# Altium PCB E17-04-PCB.PcbDoc
Units mil, origin at the board's own origin, x right, y up, seen from the top; angles counter-clockwise.
Board outline 6000 x 4000 mil, 2 copper layers (Top Layer, Bottom Layer); 153 components, 110 nets, 483 pads, 0 vias.
Unrouted connection lines stored in the file: 293.
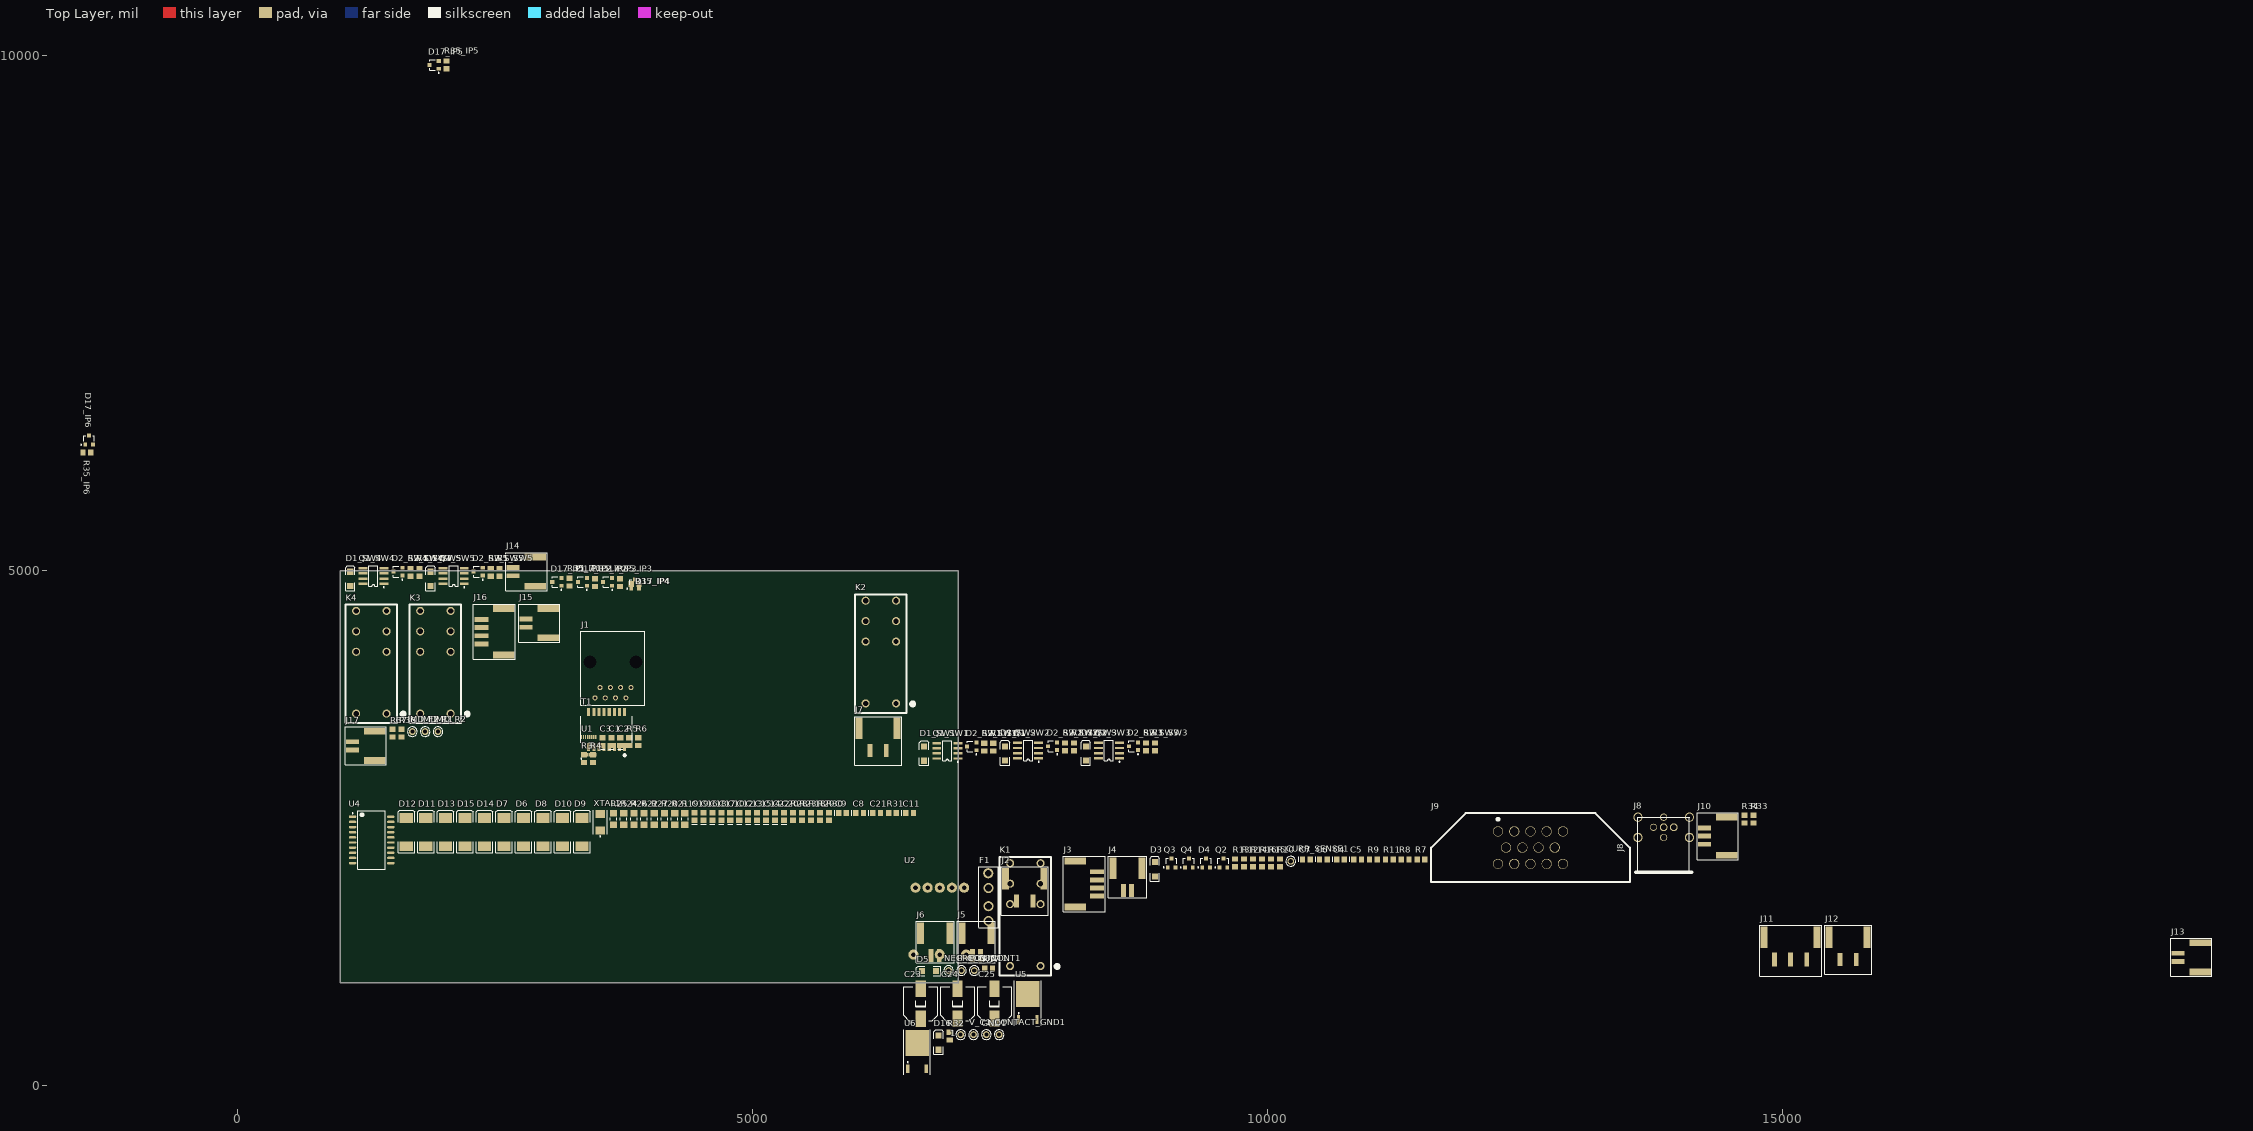
[diagram p0: Top Layer view]
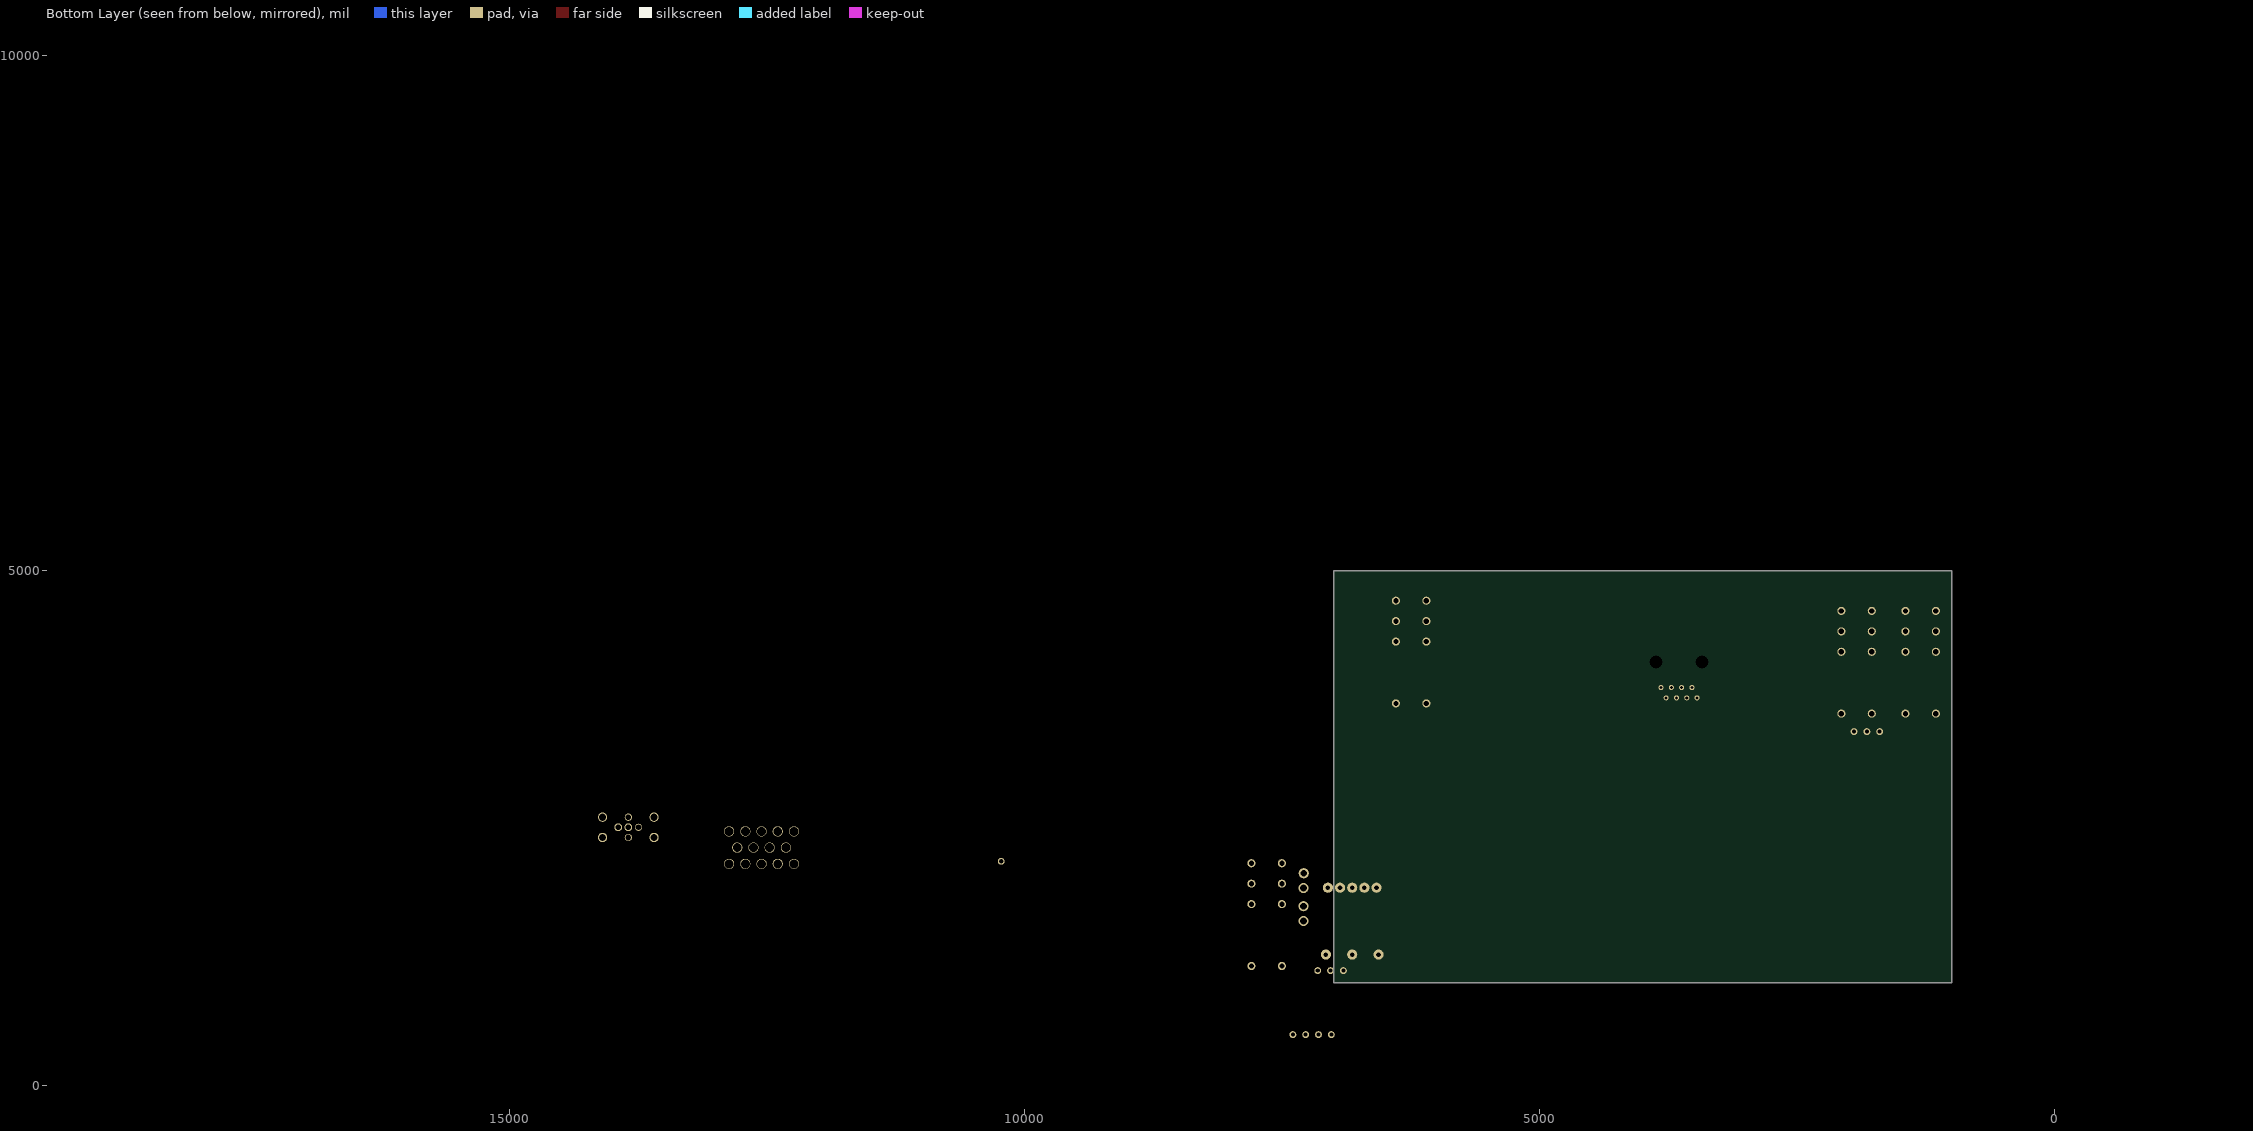
[diagram p1: Bottom Layer view, seen from below]

## Layer stack, top to bottom
Top Solder: solder mask 0.4, Solder Resist, Dk 3.5
Top Layer: signal copper 1.4
Dielectric 1: dielectric 12.6, FR-4, Dk 4.8
Bottom Layer: signal copper 1.4
Bottom Solder: solder mask 0.4, Solder Resist, Dk 3.5

## Board outline
1000,1000 7000,1000 7000,5000 1000,5000

## Design rules (kind name [scope] priority, off if disabled: settings)
Clearance [All] p1: gap=10
PolygonConnect [All] p1: connectstyle=Relief reliefconductorwidth=10 reliefentries=4 polygonreliefangle="90 Angle" airgapwidth=10
RoomDefinition SW5 [InComponentClass('SW5')] p1: confinementstyle=ConfineIn formatcopy=TRUE lockcomponents=FALSE outline 1810,4790 2590,4790 2590,5060 1810,5060
RoomDefinition SW4 [InComponentClass('SW4')] p2: confinementstyle=ConfineIn formatcopy=TRUE lockcomponents=FALSE outline 1030,4790 1810,4790 1810,5060 1030,5060
RoomDefinition SW3 [InComponentClass('SW3')] p3: confinementstyle=ConfineIn formatcopy=TRUE lockcomponents=FALSE outline 8170,3095 8955,3095 8955,3365 8170,3365
RoomDefinition SW2 [InComponentClass('SW2')] p4: confinementstyle=ConfineIn formatcopy=TRUE lockcomponents=FALSE outline 7385,3095 8170,3095 8170,3365 7385,3365
RoomDefinition SW1 [InComponentClass('SW1')] p5: confinementstyle=ConfineIn formatcopy=TRUE lockcomponents=FALSE outline 6600,3095 7385,3095 7385,3365 6600,3365
RoomDefinition IP6 [InComponentClass('IP6')] p6: confinementstyle=ConfineIn formatcopy=TRUE lockcomponents=FALSE outline 3150,3095 3320,3095 3320,3340 3150,3340
RoomDefinition TSMS [InComponentClass('TSMS')] p7: confinementstyle=ConfineIn formatcopy=TRUE lockcomponents=FALSE outline 2590,4790 2590,5190.08 3021.57,5190.08 3021.57,4790
RoomDefinition PCDC [InComponentClass('PCDC')] p8: confinementstyle=ConfineIn formatcopy=TRUE lockcomponents=FALSE outline 5975,3095 6600,3095 6600,4790 5975,4790
RoomDefinition MCU [InComponentClass('MCU')] p9: confinementstyle=ConfineIn formatcopy=TRUE lockcomponents=FALSE outline 3975,3095 5975,3095 5975,4095 3975,4095
RoomDefinition ISO_SPI [InComponentClass('ISO_SPI')] p10: confinementstyle=ConfineIn formatcopy=TRUE lockcomponents=FALSE outline 3320,3095 3975,3095 3975,4425 3320,4425
RoomDefinition IP5 [InComponentClass('IP5')] p11: confinementstyle=ConfineIn formatcopy=TRUE lockcomponents=FALSE outline 3941.57,4790 4111.57,4790 4111.57,5035 3941.57,5035
RoomDefinition IP4 [InComponentClass('IP4')] p12: confinementstyle=ConfineIn formatcopy=TRUE lockcomponents=FALSE outline 3761.57,4790 3941.57,4790 3941.57,4950 3761.57,4950
RoomDefinition IP3 [InComponentClass('IP3')] p13: confinementstyle=ConfineIn formatcopy=TRUE lockcomponents=FALSE outline 3516.57,4790 3761.57,4790 3761.57,4960 3516.57,4960
RoomDefinition IP2 [InComponentClass('IP2')] p14: confinementstyle=ConfineIn formatcopy=TRUE lockcomponents=FALSE outline 3271.57,4790 3516.57,4790 3516.57,4960 3271.57,4960
RoomDefinition IP1 [InComponentClass('IP1')] p15: confinementstyle=ConfineIn formatcopy=TRUE lockcomponents=FALSE outline 3021.57,4790 3271.57,4790 3271.57,4965 3021.57,4965
RoomDefinition IMD [InComponentClass('IMD')] p16: confinementstyle=ConfineIn formatcopy=TRUE lockcomponents=FALSE outline 1030,3095 3150,3095 3150,4690 1030,4690
RoomDefinition HVD [InComponentClass('HVD')] p17: confinementstyle=ConfineIn formatcopy=TRUE lockcomponents=FALSE outline 18755,1045 18755,1445.08 19186.57,1445.08 19186.57,1045
RoomDefinition Designator [InComponentClass('Designator')] p18: confinementstyle=ConfineIn formatcopy=TRUE lockcomponents=FALSE outline 17320,1045 18755,1045 18755,3095 17320,3095
RoomDefinition Designator [InComponentClass('Designator')] p19: confinementstyle=ConfineIn formatcopy=TRUE lockcomponents=FALSE outline 15885,1045 17320,1045 17320,3095 15885,3095
RoomDefinition CONN [InComponentClass('CONN')] p20: confinementstyle=ConfineIn formatcopy=TRUE lockcomponents=FALSE outline 11570,1045 14765,1045 14765,2665 11570,2665
RoomDefinition CON_HV [InComponentClass('CON_HV')] p21: confinementstyle=ConfineIn formatcopy=TRUE lockcomponents=FALSE outline 14765,1045 15885,1045 15885,1570 14765,1570
RoomDefinition BSPD [InComponentClass('BSPD')] p22: confinementstyle=ConfineIn formatcopy=TRUE lockcomponents=FALSE outline 7380,1045 11570,1045 11570,2240 7380,2240
RoomDefinition AIR [InComponentClass('AIR')] p23: confinementstyle=ConfineIn formatcopy=TRUE lockcomponents=FALSE outline 6575,1045 7380,1045 7380,1610 6575,1610
RoomDefinition ADC [InComponentClass('ADC')] p24: confinementstyle=ConfineIn formatcopy=TRUE lockcomponents=FALSE outline 1061.14,2079.39 6606.14,2079.39 6606.14,2689.39 1061.14,2689.39
RoutingVias [All] p1: holewidth=28 width=50 viastyle="Through Hole" minholewidth=28 minwidth=50 maxholewidth=28 maxwidth=50
SolderMaskExpansion [All] p1: expansion=4
Width [All] p1: maxlimit=10 minlimit=10 preferedwidth=10
30 further rules are at their usual default settings.

## Classes and differential pairs
component class IP6: D17_IP6 R35_IP6
channel class E17-04-INDUCTIVE_LOAD_SWITCH: SW_CONT_NEG SW_CONT_POS SW_IMD SW_RELAY_CHARGE_EN SW_RELAY_PRECHARGE
channel class Digital_IP: IP1 IP2 IP3 IP4 IP5 IP?
component class TSMS: J14
component class SW5: D1_SW5 D2_SW5 Q1_SW5 R1_SW5 R2_SW5
component class SW3: D1_SW3 D2_SW3 Q1_SW3 R1_SW3 R2_SW3
component class SW4: D1_SW4 D2_SW4 Q1_SW4 R1_SW4 R2_SW4
component class SW1: D1_SW1 D2_SW1 Q1_SW1 R1_SW1 R2_SW1
component class SW2: D1_SW2 D2_SW2 Q1_SW2 R1_SW2 R2_SW2
component class PCDC: J7 K2
component class MCU: PB1
component class ISO_SPI: C1 C2 C3 J1 R3 R4 R5 R6 T1 U1
component class Designator: 1 C23 C24 C25 CONTACT_GND1 D16 GND1 R32 U5 U6 V_C1
component class IP5: D17_IP6 R35_IP6
component class IP4: D17_IP4 R35_IP4
component class IP3: D17_IP3 R35_IP3
component class IP2: D17_IP2 R35_IP2
component class IP1: D17_IP1 R35_IP1
component class IMD: IMD_F2 IMD_R1 IMD_R2 J15 J16 J17 K3 K4 R36 R37
component class HVD: J13
component class Designator: F1 J2 U2
component class CONN: J8 J9 J10 R33 R34
component class CON_HV: J11 J12
component class BSPD: C4 C5 C6 C7 CURR_SENSE1 D3 D4 J3 J4 K1 Q2 Q3 Q4 R7 R8 R9 R10 R11 R12 R13 R14 R15 R16 U3 VR1 VR2
component class AIR: D5 J5 J6 NEG_CONT1 POS_CONT1 PRE_CONT1 R17
component class ADC: C8 C9 C10 C11 C12 C13 C14 C15 C16 C17 C18 C19 C20 C21 C22 D6 D7 D8 D9 D10 D11 D12 D13 D14 D15 R18 R19 R20 R21 R22 R23 R24 R25 R26 R27 R28 R29 R30 R31 U4 XTAL1

## Components (designator, comment, footprint, x,y, rotation, side; value= is the part's Value field where it differs from the comment)
1 "Test Point" "TEST POINT 5000K" 7022.25,494.32 r90 top
C1 "Cap" C0805 3630.1,3339.49 r90 top
C2 "Cap" C0805 3717.15,3339.49 r90 top
C3 "Cap" C0805 3543.04,3339.49 r90 top
C4 "Cap" C0805 10709.95,2196.47 r0 top
C5 "Cap" C0805 10875.69,2196.47 r0 top
C6 "Cap" C0805 10544.22,2196.47 r0 top
C7 "Cap" C0805 10378.49,2196.47 r0 top
C8 "Cap" C0805 6040.61,2645.87 r0 top
C9 "Cap" C0805 5874.87,2645.87 r0 top
C10 "Cap" C0805 4785,2612.4 r90 top
C11 "Cap" C0805 6526.06,2645.87 r0 top
C12 "Cap" C0805 4872.06,2612.4 r90 top
C13 "Cap" C0805 4959.11,2612.4 r90 top
C14 "Cap" C0805 5133.22,2612.4 r90 top
C15 "Cap" C0805 5046.16,2612.4 r90 top
C16 "Cap" C0805 4523.84,2612.4 r90 top
C17 "Cap" C0805 4697.94,2612.4 r90 top
C18 "Cap" C0805 4610.89,2612.4 r90 top
C19 "Cap" C0805 4436.78,2612.4 r90 top
C20 "Cap" C0805 5307.33,2612.4 r90 top
C21 "Cap" C0805 6206.34,2645.87 r0 top
C22 "Cap" C0805 5220.27,2612.4 r90 top
C23 "UWT1E470MCL1GB" UWT1E470MCL1GB 6634.29,794.98 r90 top
C24 "UWT1E470MCL1GB" UWT1E470MCL1GB 6992.87,794.98 r90 top
C25 "UWT1E470MCL1GB" UWT1E470MCL1GB 7351.45,794.98 r90 top
CONTACT_GND1 "Test Point" "TEST POINT 5000K" 7395.72,494.32 r90 top
CURR_SENSE1 "Test Point" "TEST POINT 5000K" 10227.5,2177.76 r90 top
D1_SW1 "OVS5MBBCR4" OVS5MBBCR4 6667.51,3223.11 r90 top (schematic designator D1)
D1_SW2 "OVS5MBBCR4" OVS5MBBCR4 7452.15,3225.08 r90 top (schematic designator D1)
D1_SW3 "OVS5MBBCR4" OVS5MBBCR4 8237.15,3225.08 r90 top (schematic designator D1)
D1_SW4 "OVS5MBBCR4" OVS5MBBCR4 1095.11,4920.08 r90 top (schematic designator D1)
D1_SW5 "OVS5MBBCR4" OVS5MBBCR4 1875.11,4920.08 r90 top (schematic designator D1)
D2_SW1 "PMEG4010ET" SOT23-3 7129.95,3292.93 r90 top (schematic designator D2)
D2_SW2 "PMEG4010ET" SOT23-3 7914.59,3294.9 r90 top (schematic designator D2)
D2_SW3 "PMEG4010ET" SOT23-3 8699.59,3294.9 r90 top (schematic designator D2)
D2_SW4 "PMEG4010ET" SOT23-3 1557.55,4989.9 r90 top (schematic designator D2)
D2_SW5 "PMEG4010ET" SOT23-3 2337.55,4989.9 r90 top (schematic designator D2)
D3 "OVS5MBBCR4" OVS5MBBCR4 8907,2100.08 r90 top
D4 "PMEG4010ET" SOT23-3 9405.12,2162.02 r0 top
D5 "OVS5MBBCR4" OVS5MBBCR4 6714.92,1113.3 r180 top
D6 "Diode" SMC 2777.48,2461.88 r90 top
D7 "Diode" SMC 2587.99,2461.88 r90 top
D8 "Diode" SMC 2966.97,2461.88 r90 top
D9 "Diode" SMC 3345.95,2461.88 r90 top
D10 "Diode" SMC 3156.46,2461.88 r90 top
D11 "Diode" SMC 1830.04,2461.88 r90 top
D12 "Diode" SMC 1640.55,2461.88 r90 top
D13 "Diode" SMC 2019.53,2461.88 r90 top
D14 "Diode" SMC 2398.51,2461.88 r90 top
D15 "Diode" SMC 2209.02,2461.88 r90 top
D16 "OVS5MGBCR4" OVS5MGBCR4 6807.84,416.65 r90 top
D17_IP1 "PMEG4010ET" SOT23-3 3101.06,4890.61 r90 top (schematic designator D17)
D17_IP2 "PMEG4010ET" SOT23-3 3349.55,4889.9 r90 top (schematic designator D17)
D17_IP3 "PMEG4010ET" SOT23-3 3594.55,4889.9 r90 top (schematic designator D17)
D17_IP4 "PMEG4010ET" SOT23-3 3861.07,4869.5 r0 top (schematic designator D17)
D17_IP5 "PMEG4010ET" SOT23-3 1910,9910 r90 top (schematic designator D17)
D17_IP6 "PMEG4010ET" SOT23-3 -1440.83,6267.02 r0 top (schematic designator D17)
F1 "BK-6013" BK-6013 7292.16,1829.72 r90 top
GND1 "Test Point" "TEST POINT 5000K" 7271.23,494.32 r90 top
IMD_F2 "Test Point" "TEST POINT 5000K" 1697.93,3436.49 r90 top
IMD_R1 "Test Point" "TEST POINT 5000K" 1822.42,3436.49 r90 top
IMD_R2 "Test Point" "TEST POINT 5000K" 1946.9,3436.49 r90 top
J1 "54602-908LF" 54602-908LF 3646.02,4114.72 r180 top
J2 "J_5023520300 HV" MOLEX_DURACLIK_3 7644.01,1794.29 r0 top
J3 "WM7171CT-ND" MOLEX_DURACLIK_4 8348.07,1957.28 r90 top
J4 "J_5023520200" MOLEX_DURACLIK_2 8641.85,1894.29 r0 top
J5 "43650-0204" MOLEX_DURACLIK_2 7175.12,1264.29 r0 top
J6 "43650-0204" MOLEX_DURACLIK_2 6775.04,1264.29 r0 top
J7 "J_5023520300 HV" MOLEX_DURACLIK_3 6220.75,3252.24 r0 top
J8 "MOLEX 84864-9003" "MOLEX 84864-9003" 13847.82,2507.5 r180 top
J9 "TE-776267-1" TE-776267-1 12239.45,2467.99 r0 top
J10 "J_5023520300" "MOLEX_DURACLIK_2 HV" 14242.68,2421.65 r270 top
J11 "J_5023520500 HV" "MOLEX_DURACLIK_3 HV" 15080.2,1224.29 r0 top
J12 "J_5023520300 HV" MOLEX_DURACLIK_3 15638.74,1224.29 r0 top
J13 "43650-0204" MOLEX_DURACLIK_2 18840.87,1245.04 r270 top
J14 "43650-0204" MOLEX_DURACLIK_2 2675.87,4990.04 r270 top
J15 "J_5023520200" MOLEX_DURACLIK_2 2800.04,4489.96 r270 top
J16 "WM7171CT-ND" MOLEX_DURACLIK_4 2368.46,4407.28 r270 top
J17 "J_5023520200" MOLEX_DURACLIK_2 1115.87,3298.7 r270 top
K1 "TE-7-1393243-5" TE-7-1393243-5 7502.2,1161.1 r90 top
K2 "TE-7-1393243-5" TE-7-1393243-5 6099.61,3710.31 r90 top
K3 "TE-7-1393243-5" TE-7-1393243-5 1774.57,3611.1 r90 top
K4 "TE-7-1393243-5" TE-7-1393243-5 1152.2,3611.1 r90 top
NEG_CONT1 "Test Point" "TEST POINT 5000K" 6905.28,1116.18 r180 top
POS_CONT1 "Test Point" "TEST POINT 5000K" 7154.25,1116.18 r90 top
PRE_CONT1 "Test Point" "TEST POINT 5000K" 7029.76,1116.18 r90 top
Q1_SW1 "DMS3015SSS" SOIC-8-150 6892.3,3250.67 r90 top (schematic designator Q1)
Q1_SW2 "DMS3015SSS" SOIC-8-150 7676.94,3252.64 r90 top (schematic designator Q1)
Q1_SW3 "DMS3015SSS" SOIC-8-150 8461.94,3252.64 r90 top (schematic designator Q1)
Q1_SW4 "DMS3015SSS" SOIC-8-150 1319.9,4947.64 r90 top (schematic designator Q1)
Q1_SW5 "DMS3015SSS" SOIC-8-150 2099.9,4947.64 r90 top (schematic designator Q1)
Q2 "2N7002P,215" SOT23-3 9572.83,2162.02 r0 top
Q3 "2N7002P,215" SOT23-3 9069.72,2162.02 r0 top
Q4 "2N7002P,215" SOT23-3 9237.42,2162.02 r0 top
R1_SW1 "Res" 2012[0805] 7338.51,3286.04 r90 top (schematic designator R1)
R1_SW2 "Res" 2012[0805] 8123.15,3288.01 r90 top (schematic designator R1)
R1_SW3 "Res" 2012[0805] 8908.15,3288.01 r90 top (schematic designator R1)
R1_SW4 "Res" 2012[0805] 1766.11,4983.01 r90 top (schematic designator R1)
R1_SW5 "Res" 2012[0805] 2546.11,4983.01 r90 top (schematic designator R1)
R2_SW1 "Res" 2012[0805] 7251.46,3286.04 r90 top (schematic designator R2)
R2_SW2 "Res" 2012[0805] 8036.09,3288.01 r90 top (schematic designator R2)
R2_SW3 "Res" 2012[0805] 8821.09,3288.01 r90 top (schematic designator R2)
R2_SW4 "Res" 2012[0805] 1679.05,4983.01 r90 top (schematic designator R2)
R2_SW5 "Res" 2012[0805] 2459.05,4983.01 r90 top (schematic designator R2)
R3 "Res" 2012[0805] 3363.53,3173.76 r90 top
R4 "Res" 2012[0805] 3450.58,3173.76 r90 top
R5 "Res" 2012[0805] 3804.21,3339.49 r90 top
R6 "Res" 2012[0805] 3891.26,3339.49 r90 top
R7 "Res" 2012[0805] 11491.63,2196.47 r0 top
R8 "Res" 2012[0805] 11337.64,2196.47 r0 top
R9 "Res" 2012[0805] 11029.67,2196.47 r0 top
R10 "Res" 2012[0805] 10121.73,2163.01 r90 top
R11 "Res" 2012[0805] 11183.66,2196.47 r0 top
R12 "Res" 2012[0805] 9773.51,2163.01 r90 top
R13 "Res" 2012[0805] 9686.46,2163.01 r90 top
R14 "Res" 2012[0805] 9860.57,2163.01 r90 top
R15 "Res" 2012[0805] 10034.68,2163.01 r90 top
R16 "Res" 2012[0805] 9947.62,2163.01 r90 top
R17 "Res" 2012[0805] 7293.49,1134.9 r0 top
R18 "Res" 2012[0805] 5568.49,2612.4 r90 top
R19 "Res" 3216[1206] 4343.82,2588.78 r90 top
R20 "Res" 3216[1206] 4146.09,2588.78 r90 top
R21 "Res" 3216[1206] 4244.95,2588.78 r90 top
R22 "Res" 3216[1206] 3948.36,2588.78 r90 top
R23 "Res" 2012[0805] 5481.44,2612.4 r90 top
R24 "Res" 3216[1206] 3750.62,2588.78 r90 top
R25 "Res" 3216[1206] 3651.76,2588.78 r90 top
R26 "Res" 3216[1206] 3849.49,2588.78 r90 top
R27 "Res" 3216[1206] 4047.22,2588.78 r90 top
R28 "Res" 2012[0805] 5394.39,2612.4 r90 top
R29 "Res" 2012[0805] 5655.55,2612.4 r90 top
R30 "Res" 2012[0805] 5742.6,2612.4 r90 top
R31 "Res" 2012[0805] 6360.33,2645.87 r0 top
R32 "Res" 2012[0805] 6916.48,479.58 r90 top
R33 "Res" 2012[0805] 14718.98,2588.01 r90 top
R34 "Res" 2012[0805] 14631.92,2588.01 r90 top
R35_IP1 "Res" 2012[0805] 3226.06,4888.01 r270 top (schematic designator R35)
R35_IP2 "Res" 2012[0805] 3471.06,4883.01 r90 top (schematic designator R35)
R35_IP3 "Res" 2012[0805] 3716.06,4883.01 r90 top (schematic designator R35)
R35_IP4 "Res" 2012[0805] 3861.07,4869.5 r0 top (schematic designator R35)
R35_IP5 "Res" 2012[0805] 2030,9910 r270 top (schematic designator R35)
R35_IP6 "Res" 2012[0805] -1461.43,6145.52 r180 top (schematic designator R35)
R36 "Res" 2012[0805] 1592.16,3421.75 r90 top
R37 "Res" 2012[0805] 1505.1,3421.75 r90 top
T1 "749010013" 749010013 3585,3456.96 r180 top
U1 "LTC6820HMS" LTC6820HMS 3410,3299.5 r0 top
U2 "SPM1203SJ" SPM1203SJ 6819.33,1596.69 r90 top
U4 "Isolated ADC" SOIC127P1030X265-20N 1303.43,2385.1 r0 top
U5 "UA78M33CKVURG3" TO-252-3 7674.6,1014.53 r0 top
U6 "UA78M05CKVURG3" TO-252-3 6598.86,537.71 r0 top
V_C1 "Test Point" "TEST POINT 5000K" 7146.74,494.32 r90 top
XTAL1 "NX5032GA 4.096MHz" NX5032GA 3521.46,2557.28 r90 top

## Footprints (in the part's own frame and the unit in brackets; to place one, negate y for a bottom-side part, rotate by r counter-clockwise, add the part's x,y. Pads: shape width x height; smd on the part's side, far side on the other; paste and mask are expansions set on the pad)
2012[0805] [mm] "Chip Resistor; Body 2.0 x 1.3 mm (LxW typ)"
  rect 1.3x1.5 smd: 1(-0.95,0) 2(0.95,0)
  body extent -0.97,-0.61 1.03,0.64, height 0.77
3216[1206] [mm] "Chip Resistor; Body 3.2 x 1.6 mm (LxW typ)"
  rect 1.6x1.8 smd: 1(-1.4,0) 2(1.4,0)
  silkscreen extent -0.3,-0.8 0.3,0.8, body extent -1.6,-0.79 1.6,0.81, height 1
54602-908LF [mm] "CONN MOD JACK R/A 8P8C"
  round 0 hole 3.2: 0(-5.715,0) 0(5.715,0)
  round 1.25 hole 0.76: 1(-4.445,6.35) 2(-3.175,8.89) 3(-1.905,6.35) 4(-0.635,8.89) 5(0.635,6.35) 6(1.905,8.89) 7(3.175,6.35) 8(4.445,8.89)
  silkscreen extent -7.9,-7.5 7.9,10.7, body extent -7.65,-7.24 7.65,10.5, height 12.7
749010013 [mil] "TRANSFORMER LAN 10/100 SMD"
  rect 30x75 smd: 1(-175,170) 2(-125,170) 3(-75,170) 4(-25,170) 5(25,170) 6(75,170) 7(125,170) 8(175,170) 9(175,-170) 10(125,-170) 11(75,-170) 12(25,-170) 13(-25,-170) 14(-75,-170) 15(-125,-170) 16(-175,-170)
  silkscreen extent -250,-130 250,260, body extent -255,-185 255,185, height 210
BK-6013 [mm] "FUSE HOLDER BLADE PCB"
  round 2.5 hole 1.65: 1(-5.895,0) 2(-2.235,0) 3(2.235,0) 4(5.895,0.051)
  silkscreen extent -7.5,-2.38 7.5,2.38
C0805 [mm] "Chip Capacitor; Body 2.0 x 1.2 mm (LxW typ)"
  rect 1.3x1.5 smd: 1(-0.95,0) 2(0.95,0)
  silkscreen extent -1.9,-0.65 -1.9,0.65
LTC6820HMS [mm] "MSOP-16"
  rect 0.305x0.889 smd: 1(-1.75,-2.171) 2(-1.25,-2.171) 3(-0.75,-2.171) 4(-0.25,-2.171) 5(0.25,-2.171) 6(0.75,-2.171) 7(1.25,-2.171) 8(1.75,-2.171) 9(1.75,2.171) 10(1.25,2.171) 11(0.75,2.171) 12(0.25,2.171) 13(-0.25,2.171) 14(-0.75,2.171) 15(-1.25,2.171) 16(-1.75,2.171)
  silkscreen extent -1.9,-3.3 -1.65,-3.05, body extent -2.02,-2.45 2.02,2.45, height 0.83
"MOLEX 84864-9003" [mil]
  round 70 hole 55: 1(0,98.5) 3(0,-98.5) 4(98.5,0)
  round 75 hole 55: 2(-98.5,0) 5(0,0)
  round 90 hole 70: 6(250,98.5) 7(250,-98.5) 8(-250,98.5) 9(-250,-98.5)
  silkscreen extent -274,-99 273,437, body extent -299,-148 299,452, height 710
MOLEX_DURACLIK_2 [mm] "2 Positions Header, Shrouded Connector 0.079\" (2.00mm) Surface Mount, Right Angle Tin"
  rect 1.7x5.3 smd: 0(-3.6,5.48) 0(3.6,5.48)
  rect 1.2x3.2 smd: 1(-1,0) 2(1,0)
  silkscreen extent -4.7,-1.8 4.7,8.4, body extent -4,-0.89 4,8.51, height 6.38
"MOLEX_DURACLIK_2 HV" [mm]
  rect 1.7x5.3 smd: 0(-4.699,5.48) 0(4.699,5.48)
  rect 1.2x3.2 smd: 1(-2,0) 2(0,0) 3(2,0)
  silkscreen extent -5.8,-1.8 5.8,8.4, body extent -5,-0.9 5,8.5, height 6.41
MOLEX_DURACLIK_3 [mm]
  rect 1.7x5.3 smd: 0(-4.699,5.48) 0(4.699,5.48)
  rect 1.2x3.2 smd: 1(-2,0) 2(2,0)
  silkscreen extent -5.8,-3.6 5.8,8.4, body extent -5,-0.9 5,8.5, height 6.41
"MOLEX_DURACLIK_3 HV" [mm] "DuraClik™ Wire-to-Board Header, Single Row, Right Angle, 5 Circuits, Tin (Sn) Plating, Black"
  rect 1.7x5.3 smd: 0(-6.55,5.48) 0(6.55,5.48)
  rect 1.2x3.45 smd: 1(-4,0) 2(0,0) 3(4,0)
  silkscreen extent -7.62,-4.1 7.62,8.4, body extent -7,-1.1 7,8.3, height 6.41
MOLEX_DURACLIK_4 [mm]
  rect 1.7x5.3 smd: 0(-5.715,5.48) 0(5.715,5.48)
  rect 1.2x3.45 smd: 1(-2.984,0) 2(-0.984,0) 3(1.016,0) 4(3.016,0)
  silkscreen extent -6.8,-2 6.8,8.4, body extent -6,-0.9 6,8.5, height 6.41
NX5032GA [mm] "NX5032GA Crystal Oscillator"
  rect 2x2.4 smd: 1(-2,0) 2(2,0)
  silkscreen extent -3.62,-1.7 3,1.7, body extent -2.51,-1.6 2.51,1.6, height 1.3
OVS5MBBCR4 [mm] "SMT LED; 2 Flat Leads; BLUE"
  rect 1.5x1.5 smd: 1(-1.75,0) 2(1.75,0)
  silkscreen extent -2.9,-1.15 3.2,1.15, body extent -1.75,-1.4 1.75,1.4, height 1.6
OVS5MGBCR4 [mm] "SMT LED; 2 Flat Leads; GREEN"
  rect 1.5x1.5 smd: 1(-1.75,0) 2(1.75,0)
  silkscreen extent -2.9,-1.15 3.2,1.15, body extent -1.75,-1.4 1.75,1.4, height 1.6
SMC [mm] "DO-214-AB/SMC; 2 C-Bend Leads; Body 7.9 x 5.9 mm, inc. leads (LxW)"
  rect 2.4x3.3 smd: 1(-3.475,0) 2(3.475,0)
  silkscreen extent -5.08,-2.05 5.42,2.06
SOIC127P1030X265-20N [mm] "SOIC, 20-Leads, Body 14.80x7.50mm, Pitch 1.27mm, IPC Medium Density"
  oval 1.85x0.6 smd: 1(-4.725,5.715) 2(-4.725,4.445) 3(-4.725,3.175) 4(-4.725,1.905) 5(-4.725,0.635) 6(-4.725,-0.635) 7(-4.725,-1.905) 8(-4.725,-3.175) 9(-4.725,-4.445) 10(-4.725,-5.715) 11(4.725,-5.715) 12(4.725,-4.445) 13(4.725,-3.175) 14(4.725,-1.905) 15(4.725,-0.635) 16(4.725,0.635) 17(4.725,1.905) 18(4.725,3.175) 19(4.725,4.445) 20(4.725,5.715)
  silkscreen extent -4.85,-7.2 3.4,7.2, body extent -3.8,-7.2 3.8,7.2, height 2.65
SOIC-8-150 [mm] "SOIC-8 150 mil package"
  rect 0.6x2.2 smd: 1(-1.905,-2.6) 2(-0.635,-2.6) 3(0.635,-2.6) 4(1.905,-2.6) 5(1.905,2.6) 6(0.635,2.6) 7(-0.635,2.6) 8(-1.905,2.6)
  silkscreen extent -2.88,-2.72 2.5,1.1, body extent -2.53,-3.12 2.47,3.08, height 1.72
SOT23-3 [mm] "SOT-23; 3 Leads; Body 3.0 x 2.5 mm, inc. leads (LxW max)"
  rect 0.95x1 smd: 1(-0.95,-1.125) 2(0.95,-1.125) 3(0,1.125)
  silkscreen extent -2.1,-1.25 1.33,1.13, body extent -1.52,-1.24 1.52,1.24, height 1.17
SPM1203SJ [mm]
  round 2.5 hole 1.15: 1(-8.25,6.5) 3(-8.25,0) 5(-8.25,-6.5) 6(8.25,-6) 7(8.25,-3) 8(8.25,0) 9(8.25,3) 10(8.25,6)
  body extent -14.05,-9 13.55,9, height 13.5
TE-7-1393243-5 [mm] "RELAY GEN PURPOSE DPDT 8A 110V"
  round 2 hole 1.3: 1(0,-7.5) 2(15.26,-7.5) 3(20.3,-7.5) 4(25.34,-7.5) 5(25.34,0) 6(20.3,0) 7(15.26,0) 8(0,0)
  silkscreen extent -2.35,-11.7 26.9,2.6, body extent -2.35,-10.1 26.65,2.6, height 15.7
TE-776267-1 [mm] "CONN HEADER 14POS R/A TIN BLK"
  round 0 hole 2.85 unplated: 0(-6.5,-4.5) 0(22.5,-4.5)
  round 2.5 hole 2.2: 1(0,0) 2(4,0) 3(8,0) 4(12,0) 5(16,0) 6(2,-4) 7(6,-4) 8(10,-4) 9(14,-4) 10(0,-8) 11(4,-8) 12(8,-8) 13(12,-8) 14(16,-8)
  silkscreen extent -16.5,-12.5 32.5,4.5, body extent -16.4,-35.8 32.4,2, height 27.77
"TEST POINT 5000K" [mm] "Test Point, 5000 Keystone Series, 0.040\" Hole"
  round 1.7 hole 1.02 mask+0.1: 1(0,0)
  silkscreen extent -1.2,-1.2 1.2,1.2
TO-252-3 [mm] "D-PAK/TO-252-3; 3 Leads"
  rect 0.8x2.2 smd: 1(-2.28,-9.5) 3(2.28,-9.5)
  rect 5.8x6.4 smd: 2(0,-3.2)
  silkscreen extent -3.3,-11 3.3,0.13
UWT1E470MCL1GB [mm] "CAP ALUM 47UF 25V 20% SMD"
  rect 4x2.5 smd: 1(-3.7,0) 2(3.7,0)
  silkscreen extent -4.2,-4.2 4.2,4.2, body extent -4.85,-4.25 4.85,4.25, height 10.5

## Part data
1 CONTACT_GND1 CURR_SENSE1 GND1 IMD_F2 IMD_R1 IMD_R2 NEG_CONT1 POS_CONT1 PRE_CONT1 V_C1: "5000-5004, 5015-5019 Keystone Electronics"
C1 C2 C3 C4 C5 C6 C7 C8 C9 C10 C11 C12 C13 C14 C15 C16 C17 C18 C19 C20 C21 C22: "Capacitor"
C23 C24 C25: "CAP ALUM 47UF 25V 20% SMD"
D1_SW1 D1_SW2 D1_SW3 D1_SW4 D1_SW5 D3 D5: "Typical BLUE LED"
D2_SW1 D2_SW2 D2_SW3 D2_SW4 D2_SW5 D4 D17_IP1 D17_IP2 D17_IP3 D17_IP4 D17_IP5 D17_IP6: "SCHOTTKY RECT 40V 1A SOT-23"
D6 D7 D8 D9 D10 D11 D12 D13 D14 D15: "Default Diode"
D16: "Typical GREEN LED"
F1: "FUSE HOLDER BLADE PCB"
J1: "CONN MOD JACK R/A 8P8C"
J2 J7 J12: "MOLEX DURACLIK 2-PIN RA HV"
J3 J16: library part J_5023520400, "MOLEX DURACLIK 4-PIN RA"
J4 J15 J17: "MOLEX DURACLIK 2-PIN RA"
J5 J6 J13 J14: library part J_5023520200, "MOLEX DURACLIK 2-PIN RA"
J8: "CAN Micro-Change M12, Right Angle, Male"
J9: "CONN HEADER 14POS R/A TIN BLK"
J10: "MOLEX DURACLIK 3-PIN RA"
J11: "MOLEX DURACLIK 3-PIN RA HV"
K1 K2 K3 K4: "RELAY GEN PURPOSE DPDT 8A 110V"
Q1_SW1 Q1_SW2 Q1_SW3 Q1_SW4 Q1_SW5: "N-Channel Power MOSFET"
Q2 Q3 Q4: "N-Channel Enhancement Mode Vertical DMOS FET"
R1_SW1 R1_SW2 R1_SW3 R1_SW4 R1_SW5 R2_SW1 R2_SW2 R2_SW3 R2_SW4 R2_SW5 R3 R4 R5 R6 R7 R8 R9 R10 R11 R12 R13 R14 R15 R16 R17 R18 R19 R20 R21 R22 R23 R24 R25 R26 R27 R28 R29 R30 R31 R32 R33 R34 R35_IP1 R35_IP2 R35_IP3 R35_IP4 R35_IP5 R35_IP6 R36 R37: "Surface Mount Resistor"
T1: "TRANSFORMER LAN 10/100 SMD"
U1: "IC COMM INTERFACE ISOSPI"
U4: library part ADE7913, "3-Channel, Isolated, Sigma Delta ADC with SPI"
U5: "3.3V Regulator"
U6: "5.0V Regulator"
XTAL1: library part NX5032GA, "NX5032GA"

## Nets (pads, with @x,y where several pads share a name; then routed paths per layer and width w, separated by ;. In a path a pad name is that pad's centre, name@x,y a point inside that pad or via, vN(x,y) a via of type N, cw(c..) or ccw(c..) an arc to the next point about the centre after c; other vN are vias at no path point)
3.3V: 1.1 C1.2 C3.2 C11.1 C12.1 C25.1 D16.1 D17_IP1.3 D17_IP2.3 D17_IP3.3 D17_IP4.3 D17_IP5.3 D17_IP6.3 R5.1 R29.1 U1.6 U1.7 U1.8 U1.9 U1.12 U4.19 U5.3
5V: C5.2 C23.1 J3.2 J9.12 R10.1 R11.2 R14.1 U6.3
12V: C24.1 D1_SW3.1 D2_SW3.3 D3.1 D4.3 J9.8 J9.14 K1.8 U5.1 U6.1
"\I\M\D\ \F\A\U\L\T": IMD_F2.1 J15.2 J17.1 Q1_SW4.4 R2_SW4.2 R35_IP4.1 R37.1
"BSPD RESET": J4.1 K1.4 Q2.2
CAN_H: J8.4 R33.2
CAN_L: J8.5 R33.1
CONTACT: CONTACT_GND1.1
CONTACT_V+: D1_SW1.1 D1_SW2.1 D1_SW5.1 D2_SW1.3 D2_SW2.3 D2_SW5.3 D5.1 J5.1 J6.2 J14.2 K2.8 R35_IP6.1
CURRENT_REF: C4.2 R7.2
CURRENT_SENSE: C4.1 CURR_SENSE1.1 R8.2 R16.2
GND: C1.1 C2.1 C3.1 C5.1 C6.1 C7.1 C21.1 C22.1 C23.2 C24.2 C25.2 D2_SW4.1 GND1.1 J3.1 J4.2 J8.3 J8.6 J8.7 J8.8 J8.9 J9.10 J9.13 J10.1 J16.4 K1.3 K3.1 K4.1 K4.6 Q1_SW1.1 Q1_SW1.2 Q1_SW1.3 Q1_SW2.1 Q1_SW2.2 Q1_SW2.3 Q1_SW3.1 Q1_SW3.2 Q1_SW3.3 Q1_SW4.1 Q1_SW4.2 Q1_SW4.3 Q1_SW4.5 Q1_SW4.6 Q1_SW4.7 Q1_SW4.8 Q1_SW5.1 Q1_SW5.2 Q1_SW5.3 Q4.2 R1_SW4.1 R2_SW1.1 R2_SW2.1 R2_SW3.1 R2_SW4.1 R2_SW5.1 R4.1 R13.1 R16.1 R17.1 R32.1 R34.1 R36.2 R37.2 U1.1 U1.13 U1.14 U4.11 U5.2 U6.2
HV_COM: C8.1 C13.1 C14.1 C15.1 C16.2 C17.1 C18.1 C19.1 C20.1 J7.2 J11.3 R18.1 R23.1 R28.1 U4.10
IMD_PWM+: IMD_R1.1 J17.2 R35_IP3.1 R36.1
IMD_RESET: IMD_R2.1 J15.1 K3.5 K3.8 K4.8
IMD_SENSE_GND1: J9.6 J16.2
IMD_SENSE_GND2: J9.7 J16.3
NEG_CONT: NEG_CONT1.1
NetC2_2: C2.2 T1.7
NetC6_2: C6.2 Q3.1 R11.1 R12.2
NetC7_2: C7.2 Q4.1 R14.2 R15.2
NetC8_2: C8.2 D7.1 D9.2 D11.1 D13.2 R18.2 U4.5
NetC9_1: C9.1 C10.1 U4.2
NetC9_2: C9.2 C10.2 U4.1
NetC11_2: C11.2 C12.2 U4.20
NetC13_2: C13.2 D6.2 D8.1 R22.2 R23.2 U4.3
NetC14_2: C14.2 D10.2 D12.1 R27.2 R28.2 U4.4
NetC15_2: C15.2 D14.1 D15.2 R30.1 U4.6
NetC16_1: C16.1 D14.2 D15.1 R31.1 U4.7
NetC17_2: C17.2 C18.2 U4.9
NetC19_2: C19.2 C20.2 U4.8
NetC21_2: C21.2 U4.13 XTAL1.1
NetC22_2: C22.2 U4.14 XTAL1.2
NetD1_SW1_2: D1_SW1.2 R1_SW1.2
NetD1_SW2_2: D1_SW2.2 R1_SW2.2
NetD1_SW3_2: D1_SW3.2 R1_SW3.2
NetD1_SW4_2: D1_SW4.2 R1_SW4.2
NetD1_SW5_2: D1_SW5.2 R1_SW5.2
NetD2_SW1_1: D2_SW1.1 J6.1 Q1_SW1.5 Q1_SW1.6 Q1_SW1.7 Q1_SW1.8 R1_SW1.1
NetD2_SW2_1: D2_SW2.1 J5.2 Q1_SW2.5 Q1_SW2.6 Q1_SW2.7 Q1_SW2.8 R1_SW2.1
NetD2_SW3_1: D2_SW3.1 J9.9 Q1_SW3.5 Q1_SW3.6 Q1_SW3.7 Q1_SW3.8 R1_SW3.1
NetD2_SW5_1: D2_SW5.1 K2.1 Q1_SW5.5 Q1_SW5.6 Q1_SW5.7 Q1_SW5.8 R1_SW5.1
NetD3_2: D3.2 R9.2
NetD4_1: D4.1 K1.1 Q2.3 R9.1
NetD5_2: D5.2 R17.2
NetD6_1: D6.1 D7.2
NetD8_2: D8.2 D9.1
NetD10_1: D10.1 D11.2
NetD12_2: D12.2 D13.1
NetD16_2: D16.2 R32.2
NetD17_IP1_1: D17_IP1.1 R35_IP1.2
NetD17_IP2_1: D17_IP2.1 R35_IP2.2
NetD17_IP3_1: D17_IP3.1 R35_IP3.2
NetD17_IP4_1: D17_IP4.1 R35_IP4.2
NetD17_IP5_1: D17_IP5.1 R35_IP5.2
NetD17_IP6_1: D17_IP6.1 R35_IP6.2
NetF1_1: F1.1 F1.2 U2.9
NetF1_3: F1.3 F1.4 J9.3
NetJ1_1: J1.1 T1.11
NetJ1_2: J1.2 T1.9
NetJ2_1: J2.1 U2.1
NetJ2_2: J2.2 U2.5
NetJ3_3: J3.3 R8.1
NetJ3_4: J3.4 R7.1
NetJ7_1: J7.1 K2.6
NetJ8_1: J8.1 R34.2
NetJ9_1: J9.1 K4.7
NetJ9_4: J9.4 U2.10
NetJ9_5: J9.5 K1.6 R35_IP5.1
NetJ9_11: J9.11 R13.2
NetJ11_1: J11.1 K2.5 R19.1
NetJ11_2: J11.2 K2.7 R24.1
NetJ12_1: J12.1 R31.2
NetJ12_2: J12.2 R30.2
NetJ13_1: J13.1 K1.5 R35_IP1.1
NetJ13_2: J13.2 K3.4 R35_IP2.1
NetJ14_1: J14.1 K3.3
NetPB1_27: Q1_SW3.4 R2_SW3.2
NetPB1_29: Q1_SW1.4 R2_SW1.2
NetPB1_31: Q1_SW5.4 R2_SW5.2
NetPB1_33: Q1_SW2.4 R2_SW2.2
NetPB1_40: U1.5
NetPB1_42: U1.4
NetPB1_44: R5.2 U1.3
NetPB1_46: U1.2
NetPB1_51: U4.16
NetPB1_53: R29.2 U4.15
NetPB1_55: U4.17
NetPB1_59: U4.18
NetQ2_1: Q2.1 Q3.3 R10.2
NetQ3_2: Q3.2 Q4.3
NetR3_1: R3.1 R4.2 U1.15
NetR3_2: R3.2 U1.16
NetR6_1: R6.1 T1.6 U1.10
NetR6_2: R6.2 T1.8 U1.11
NetR12_1: R12.1
NetR15_1: R15.1
NetR19_2: R19.2 R20.1
NetR20_2: R20.2 R21.1
NetR21_2: R21.2 R22.1
NetR24_2: R24.2 R25.1
NetR25_2: R25.2 R26.1
NetR26_2: R26.2 R27.1
NetU3_4: 
NetU3_6: 
POS_CONT: POS_CONT1.1
PRE_CONT: PRE_CONT1.1
UART_RX: J10.2
UART_TX: J10.3
V_CAN: J8.2 V_C1.1
pads on no net: D1_SW4.1 D2_SW1.2 D2_SW2.2 D2_SW3.2 D2_SW4.2 D2_SW4.3 D2_SW5.2 D4.2 D17_IP1.2 D17_IP2.2 D17_IP3.2 D17_IP4.2 D17_IP5.2 D17_IP6.2 J1.0 J1.3 J1.4 J1.5 J1.6 J1.7 J1.8 J2.0 J3.0 J4.0 J5.0 J6.0 J7.0 J9.0 J9.2 J10.0 J11.0 J12.0 J13.0 J14.0 J15.0 J16.0 J16.1 J17.0 K1.2 K1.7 K2.2 K2.3 K2.4 K3.2 K3.6 K3.7 K4.2 K4.3 K4.4 K4.5 T1.1 T1.2 T1.3 T1.4 T1.5 T1.10 T1.12 T1.13 T1.14 T1.15 T1.16 U2.3 U2.6 U2.7 U2.8 U4.12